# Altium PCB FPSO.PcbDoc
Units mm, origin at the board's own origin, x right, y up, seen from the top; angles counter-clockwise.
Board outline 61 x 62 mm, 2 copper layers (Top Layer, Bottom Layer); 12 components, 9 nets, 54 pads, 0 vias.
Unrouted connection lines stored in the file: 3.
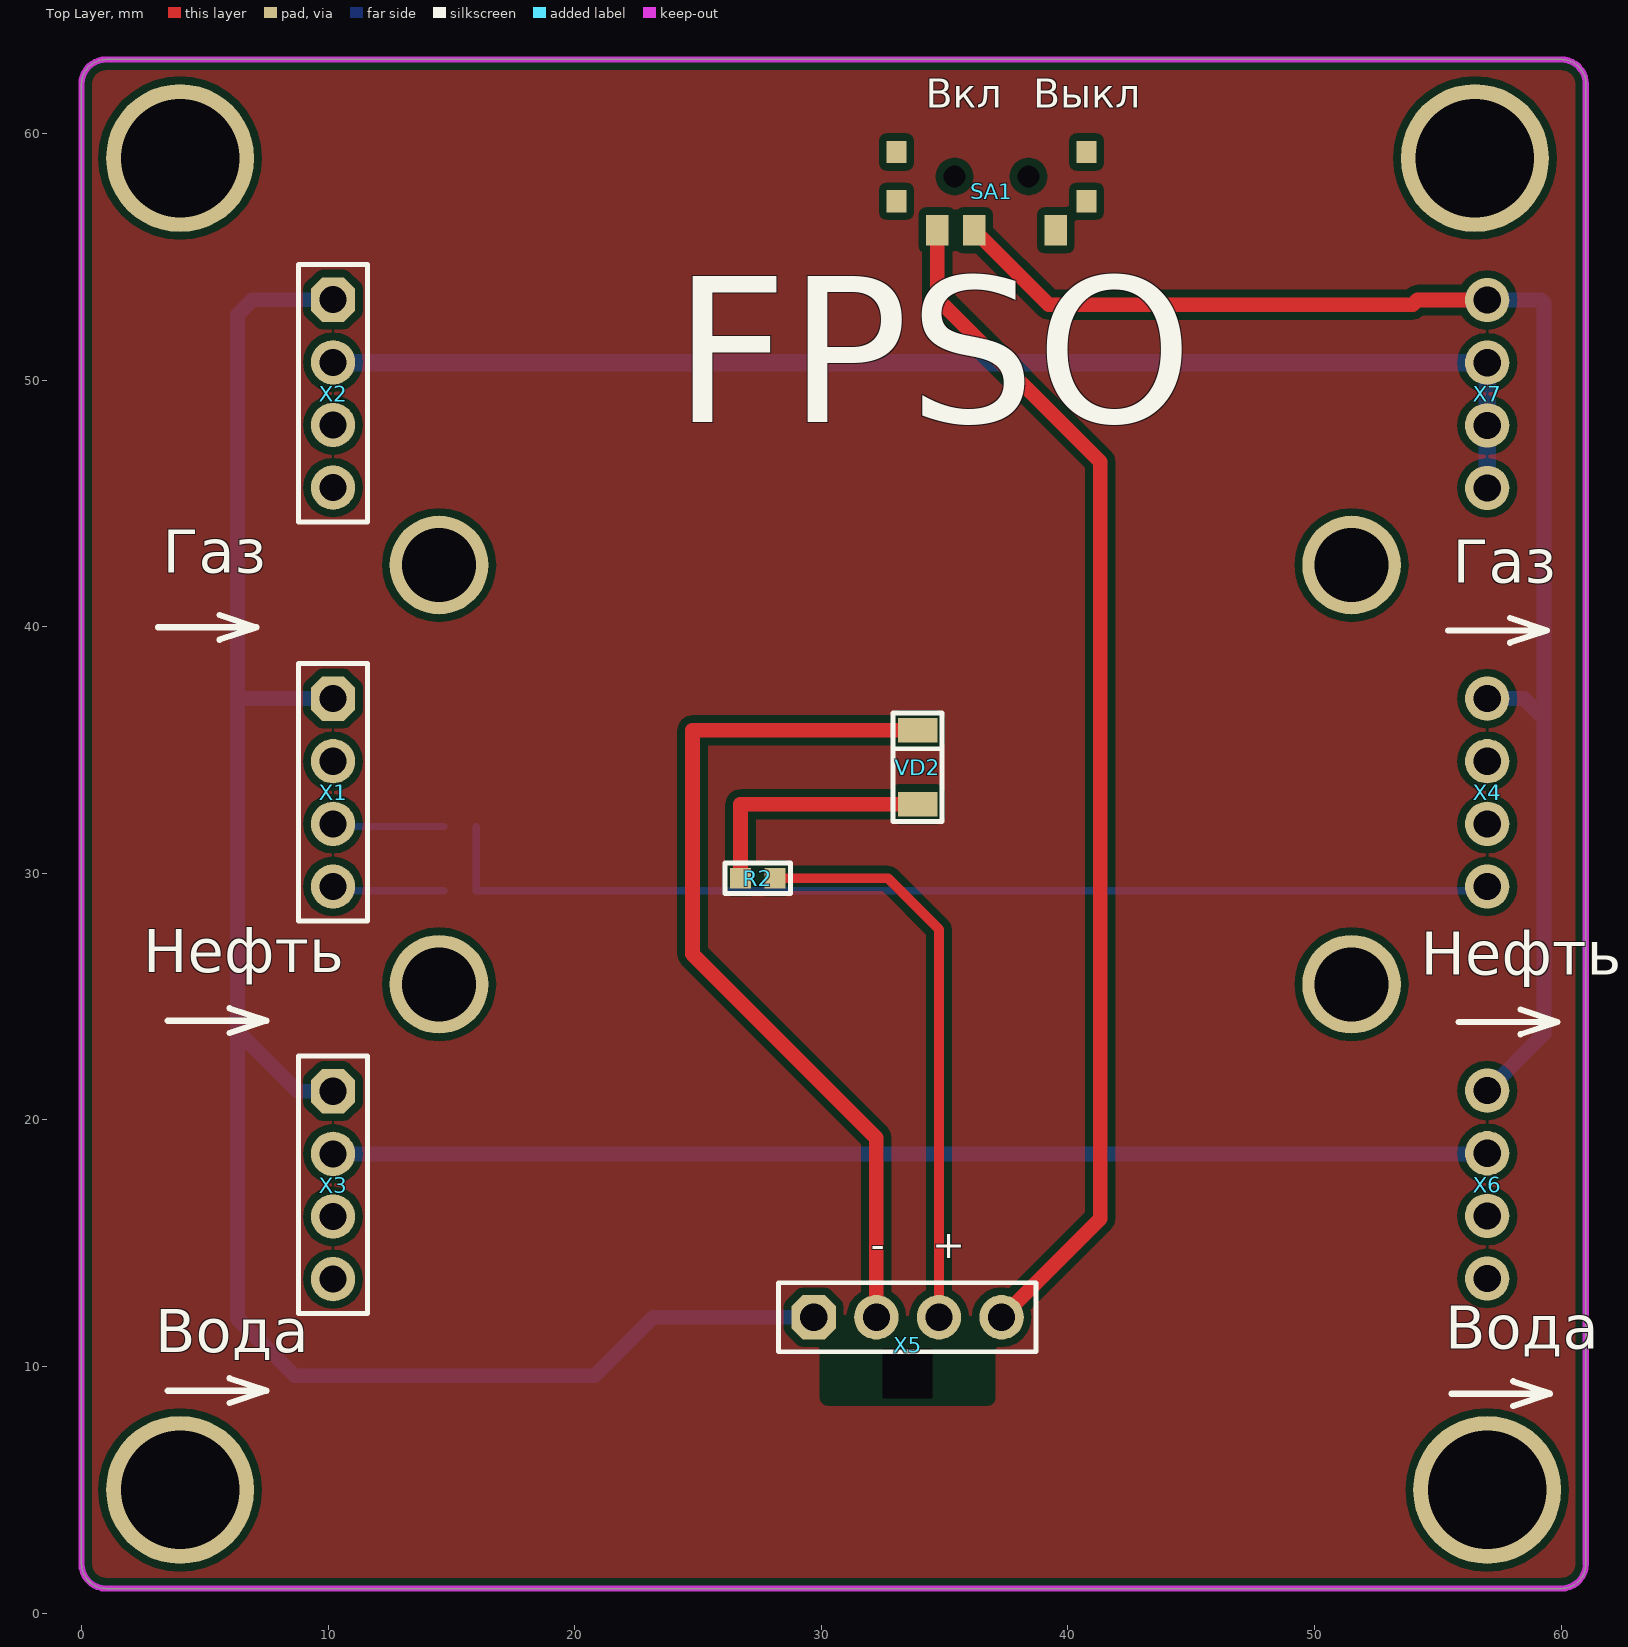
[diagram p0: Top Layer view]
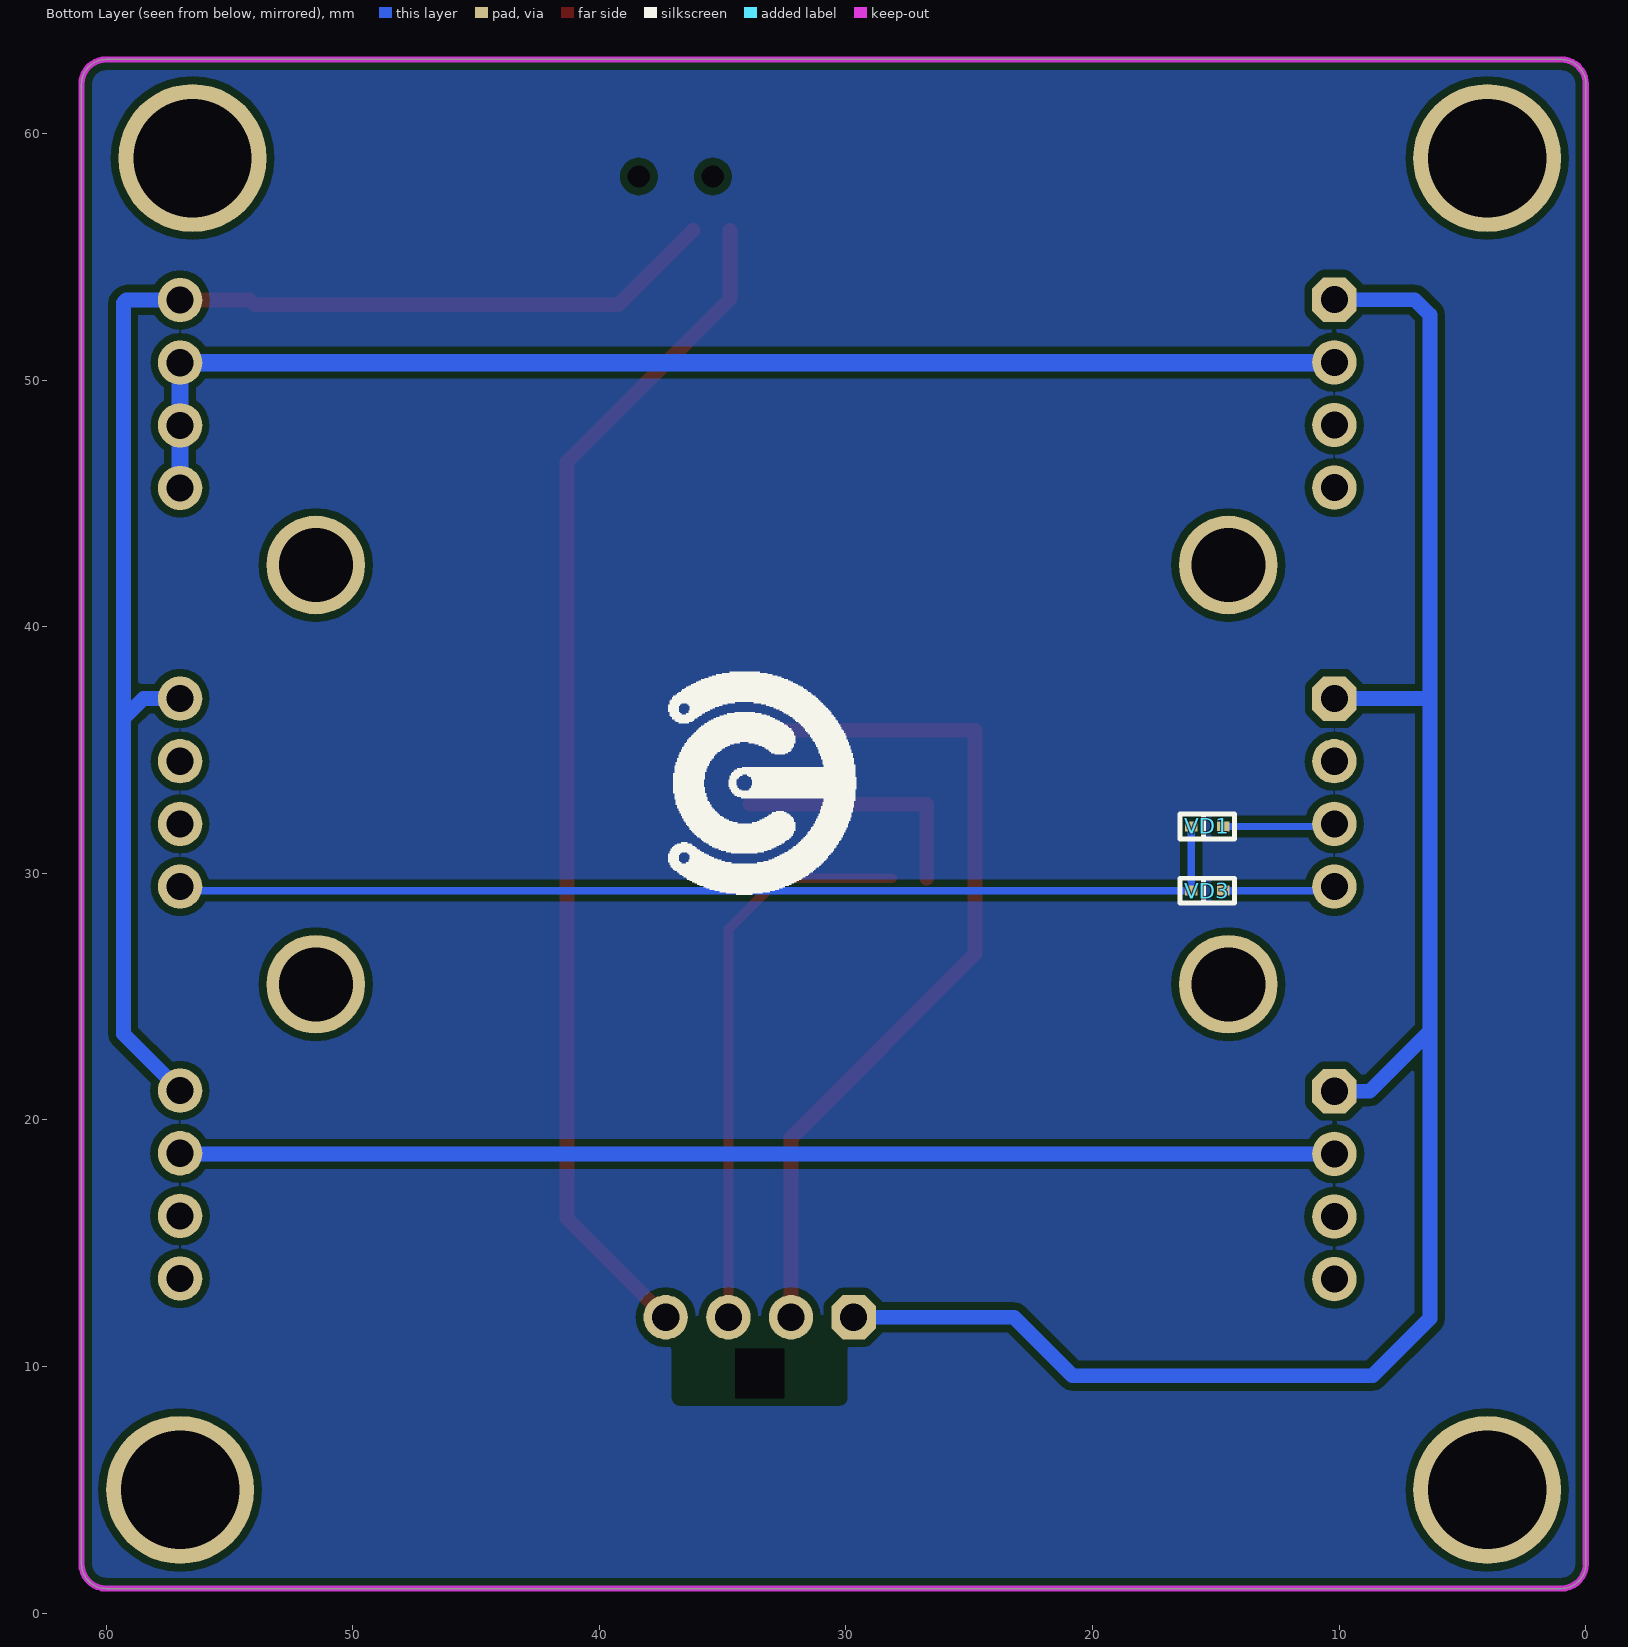
[diagram p1: Bottom Layer view, seen from below]

## Layer stack, top to bottom
Top Solder: solder mask 0.0102, Solder Resist, Dk 3.5
Top Layer: signal copper 0.0356
Dielectric 1: dielectric 0.32, FR-4, Dk 4.8
Bottom Layer: signal copper 0.0356
Bottom Solder: solder mask 0.0102, Solder Resist, Dk 3.5

## Board outline
0,2 ccw(c1,2) 1,1 60,1 ccw(c60,2) 61,2 61,62 ccw(c60,62) 60,63 1,63 ccw(c1,62) 0,62

## Design rules (kind name [scope] priority, off if disabled: settings)
Clearance [All] p1: gap=0.3 ignorepadtopadclearanceinfootprint=FALSE
PolygonConnect [All] p1: connectstyle=Relief reliefconductorwidth=0.254 reliefentries=4 polygonreliefangle="90 Angle" airgapwidth=0.254
RoutingVias [All] p1: holewidth=0.711 width=1.27 viastyle="Through Hole" minholewidth=0.711 minwidth=1.27 maxholewidth=0.711 maxwidth=1.27
SolderMaskExpansion [All] p1: expansion=0.102
Width [All] p1: maxlimit=10 minlimit=0.254 preferedwidth=0.254 minimp=50.000000 maximp=50.000000 favimp=50.000000
30 further rules are at their usual default settings.

## Components (designator, comment, footprint, x,y, rotation, side; value= is the part's Value field where it differs from the comment)
R2 "Resistor film, 100R, ±5%, 0603, 0.1W, -55...+125°C" "RES: 0603" 27.425,29.8 r0 top value=100R
SA1 "SS-3292S-L1" SS-3292S-L1 36.925,58.25 r90 top
VD1 "Schottky diode, 80V, 500mA, 1V, 15pF, SOD-123, -55...+150°C" "DIODE: SOD523" 14.7,31.9 r0 bottom
VD2 "LED, *, *, *, -55...+150°C" "LED: 1206R" 33.9,34.3 r90 top
VD3 "Schottky diode, 80V, 500mA, 1V, 15pF, SOD-123, -55...+150°C" "DIODE: SOD523" 14.7,29.3 r0 bottom
X1 "Connector, 4pin, 2.54mm, 500VAC, 3A" "CON: PBS-4 R" 10.2,33.275 r270 top
X2 "Connector, 4pin, 2.54mm, 500VAC, 3A" "CON: PBS-4 R" 10.2,49.45 r270 top
X3 "Connector, 4pin, 2.54mm, 500VAC, 3A" "CON: PBS-4 R" 10.2,17.355 r270 top
X4 "Connector, 4pin, 2.54mm, 500VAC, 3A" "4PLS RIGHT ANGLE 2" 57,33.275 r270 top
X5 "PBS-4 cut" "PBS-4 CUT" 33.5,12 r0 top
X6 "Connector, 4pin, 2.54mm, 500VAC, 3A" "4PLS RIGHT ANGLE 2" 57,17.38 r270 top
X7 "Connector, 4pin, 2.54mm, 500VAC, 3A" "4PLS RIGHT ANGLE 2" 57,49.435 r270 top

## Footprints (in the part's own frame and the unit in brackets; to place one, negate y for a bottom-side part, rotate by r counter-clockwise, add the part's x,y. Pads: shape width x height; smd on the part's side, far side on the other; paste and mask are expansions set on the pad)
"4PLS RIGHT ANGLE 2" [mm]
  round 1.8 hole 1.1: 1(-3.81,0) 2(-1.27,0) 3(1.27,0) 4(3.81,0)
  body extent -5.04,-0.32 5.14,10.04, height 2.57
"CON: PBS-4 R" [mm] "PBS-5"
  oct 1.8x1.8 hole 1.1: 1(-3.81,0)
  round 1.8 hole 1.1: 2(-1.27,0) 3(1.27,0) 4(3.81,0)
  silkscreen extent -5.23,-1.4 5.2,1.4, body extent -5.08,-10.2 5.08,0, height 2.54
"DIODE: SOD523" [mm]
  rect 0.5x0.4 smd: 1(0,0) 2(1.3,0)
  silkscreen extent -0.45,-0.5 1.75,0.5, body extent -0.17,-0.4 1.48,0.4, height 0.65
"LED: 1206R" [mm]
  rect 1x1.6 smd: 1(-1.5,0) 2(1.5,0)
  silkscreen extent -2.2,-1 2.2,1, body extent -1.6,-0.8 1.6,0.8, height 1.1
"PBS-4 CUT" [mm]
  oct 1.8x1.8 hole 1.1: 1(-3.81,0)
  round 1.8 hole 1.1: 2(-1.27,0) 3(1.27,0) 4(3.81,0)
  rrect50% 0x0 hole 2 square: ""(0,-2.28)
  silkscreen extent -5.23,-1.4 5.2,1.4, body extent -5.08,-1.27 5.08,1.27, height 8.4
"RES: 0603" [mm]
  rect 0.85x0.85 smd: 1(-0.7,0) 2(0.7,0)
  silkscreen extent -1.33,-0.63 1.33,0.63, body extent -0.8,-0.4 0.8,0.4, height 0.44
SS-3292S-L1 [mm]
  rect 1.25x0.9 smd: 1(-2.175,-2.576) 2(-2.175,0.724) 3(-2.175,2.224)
  rect 0.9x0.8 smd: ""(-1,3.874) ""(-1,-3.826) ""(1,3.874) ""(1,-3.826)
  round 0 hole 0.9 unplated: ""(0,1.524) ""(0,-1.476)
  body extent -1.52,-4.32 1.52,4.44, height 6

## Part data
R2: library part Resistor_0603, Manufacturer=Yageo, Package=0603, PartNumber=RC0603JR-07100RL, Power=0.1W, Temperature=-55...+125°C, Tolerance=±5%, TypeResistor="Resistor film", HelpURL=https://www.digikey.com/product-detail/en/yageo/RC0603JR-07100RL/311-100GRCT-ND/729644, ValueManufacturerPartNumber="Resistor film, 100R, ±5%, 0603, 0.1W, -55...+125°C"
VD1 VD3: library part Schottky_single, Current=500mA, Manufacturer="Diodes Incorporated", Package=SOD-123, PartNumber=MBR0580S1-7, Temperature=-55...+150°C, Voltage=80V, VoltageDrop=1V, HelpURL=https://www.digikey.com/product-detail/en/diodes-incorporated/MBR0580S1-7/MBR0580S1-7DICT-ND/5080371, RecoveryTime=15pF, TypeDiode="Schottky diode", ValueManufacturerPartNumber="Schottky diode, 80V, 500mA, 1V, 15pF, SOD-123, -55...+150°C"
VD2: library part LED_single, Color=GREEN, Temperature=-55...+150°C, TypeDiode=LED, ValueManufacturerPartNumber="LED, *, *, *, -55...+150°C"
X1 X2 X3: library part PBS-4, CurrentMax=3A, Manufacturer=Connfly, VoltageMax=500VAC, CommentText="\"Разъем\"", HelpURL=https://www.chipdip.ru/product/pbs-4, Multichannel=4pin, PartNumber=PBS-4, Pitch=2.54mm, TypeConnector=Connector, ValueManufacturerPartNumber="Connector, 4pin, 2.54mm, 500VAC, 3A"
X4 X6 X7: library part PLS-4, CurrentMax=3A, Manufacturer=Connfly, VoltageMax=500VAC, CommentText="\"Разъем\"", HelpURL=https://www.chipdip.ru/product/pls-4, Multichannel=4pin, PartNumber=PLS-4, Pitch=2.54mm, TypeConnector=Connector, ValueManufacturerPartNumber="Connector, 4pin, 2.54mm, 500VAC, 3A"

## Free pads (board coordinates)
  round 6 hole 4.8: ""(4,5) ""(4,59) ""(56.5,59) ""(57,5)
  round 4 hole 3: ""(14.5,25.5) ""(14.5,42.5) ""(51.5,25.5) ""(51.5,42.5)

## Nets (pads, with @x,y where several pads share a name; then routed paths per layer and width w, separated by ;. In a path a pad name is that pad's centre, name@x,y a point inside that pad or via, vN(x,y) a via of type N, cw(c..) or ccw(c..) an arc to the next point about the centre after c; other vN are vias at no path point)
GND: SA1.3 VD2.2 X1.1 X2.1 X3.1 X5.1 X5.2 X5.4 | length 163.4
  Top Layer w0.6: X5.2 32.23,19.27 24.775,26.725 24.775,35.8 VD2.2 ; SA1.3 34.701,53.299 41.31,46.69 41.31,16 X5.4
  Bottom Layer w0.6: X3.1 8.76,21.165 6.325,23.6 ; X1.1 6.415,37.085 6.325,37.175 ; X2.1 6.935,53.26 6.325,52.65 6.325,37.175 ; X5.1 23.19,12 20.815,9.625 8.65,9.625 6.325,11.95 6.325,23.6 ; 6.325,23.6 6.325,37.175
NetR2_1: R2.1 VD2.1 | length 10.2
  Top Layer w0.6: R2.1 26.725,32.8 VD2.1
NetSA1_2: SA1.2 X4.1 X6.1 X7.1 | length 60
  Top Layer w0.6: SA1.2 39.225,53.051 53.975,53.051 54.169,53.245 X7.1
  Bottom Layer w0.6: X6.1 59.3,23.49 59.3,36.275 ; X4.1 58.49,37.085 59.3,36.275 ; X7.1 59.18,53.245 59.3,53.125 59.3,36.275
NetVD1_1: VD1.1 X1.3 | length 4.5
  Bottom Layer w0.3: X1.3 10.305,31.9 VD1.1
NetVD1_2: VD1.2 VD3.2 X4.4 | length 43.7
  Bottom Layer w0.3: VD1.2 VD3.2 56.835,29.3 X4.4
NetVD3_1: VD3.1 X1.4 | length 4.6
  Bottom Layer w0.3: X1.4 10.365,29.3 VD3.1
NetX1_2: 
NetX3_2: X2.2 X3.2 X6.2 X7.2 X7.3 X7.4 | length 98.7
  Bottom Layer w0.6: X3.2 X6.2@57,18.625
  Bottom Layer w0.7: X2.2 10.215,50.705 X7.2 X7.3 X7.4
VCC: R2.2 X5.3 | length 23.2
  Top Layer w0.4: R2.2 32.7,29.8 34.77,27.73 X5.3
pads on no net: SA1. SA1.1 X1.2 X2.3 X2.4 X3.3 X3.4 X4.2 X4.3 X5. X6.3 X6.4

## Polygon pours and split planes (outlines as drawn)
no net on Top Layer "Top Layer-No Net" (solid, pour order 10): 0,2 ccw(c1,2) 1,1 60,1 ccw(c60,2) 61,2 61,62 ccw(c60,62) 60,63 1,63 ccw(c1,62) 0,62
no net on Bottom Layer "Top Layer-No Net1" (solid, pour order 11): 0,2 ccw(c1,2) 1,1 60,1 ccw(c60,2) 61,2 61,62 ccw(c60,62) 60,63 1,63 ccw(c1,62) 0,62

## Keep-outs
Keep-Out Layer:
  the board outline again, w0.254

## Silkscreen, mask and mechanical layers (free items; w line width, h text height)
Top Overlay:
  lines w0.254: 3.1,39.975 7.1,39.975 ; 3.5,9.025 7.5,9.025 ; 3.5,24.025 7.5,24.025 ; 5.6,39.475 7.1,39.975 ; 5.6,40.475 7.1,39.975 ; 6,8.525 7.5,9.025 ; 6,9.525 7.5,9.025 ; 6,23.525 7.5,24.025 ; 6,24.525 7.5,24.025 ; 55.425,39.85 59.425,39.85 ; 55.55,8.9 59.55,8.9 ; 55.85,23.975 59.85,23.975 ; 57.925,39.35 59.425,39.85 ; 57.925,40.35 59.425,39.85 ; 58.05,8.4 59.55,8.9 ; 58.05,9.4 59.55,8.9 ; 58.35,23.475 59.85,23.975 ; 58.35,24.475 59.85,23.975
  text "Вкл" at 34.225,60.65 h2
  text "Выкл" at 38.6,60.65 h2
  text "FPSO" at 24,46 h12
  text "Газ" at 3.3,41.6 h3
  text "Газ" at 55.6,41.2 h3
  text "Нефть" at 2.5,25.4 h3
  text "Нефть" at 54.3,25.3 h3
  text "-" at 32,14 h2
  text "+" at 34.5,14 h2
  text "Вода" at 55.3,10.125 h3
  text "Вода" at 3,10 h3
Bottom Overlay:
  drawing of 376 lines, arcs and shapes, not listed